# Altium PCB PCB1.PcbDoc (part 2 of 3)
Units mm, origin at the board's own origin, x right, y up, seen from the top; angles counter-clockwise.
Board outline 55.24 x 34.04 mm, 2 copper layers (Top Layer, Bottom Layer), stack 3.048 mm thick; 216 components, 8 nets, 576 pads, 0 vias.
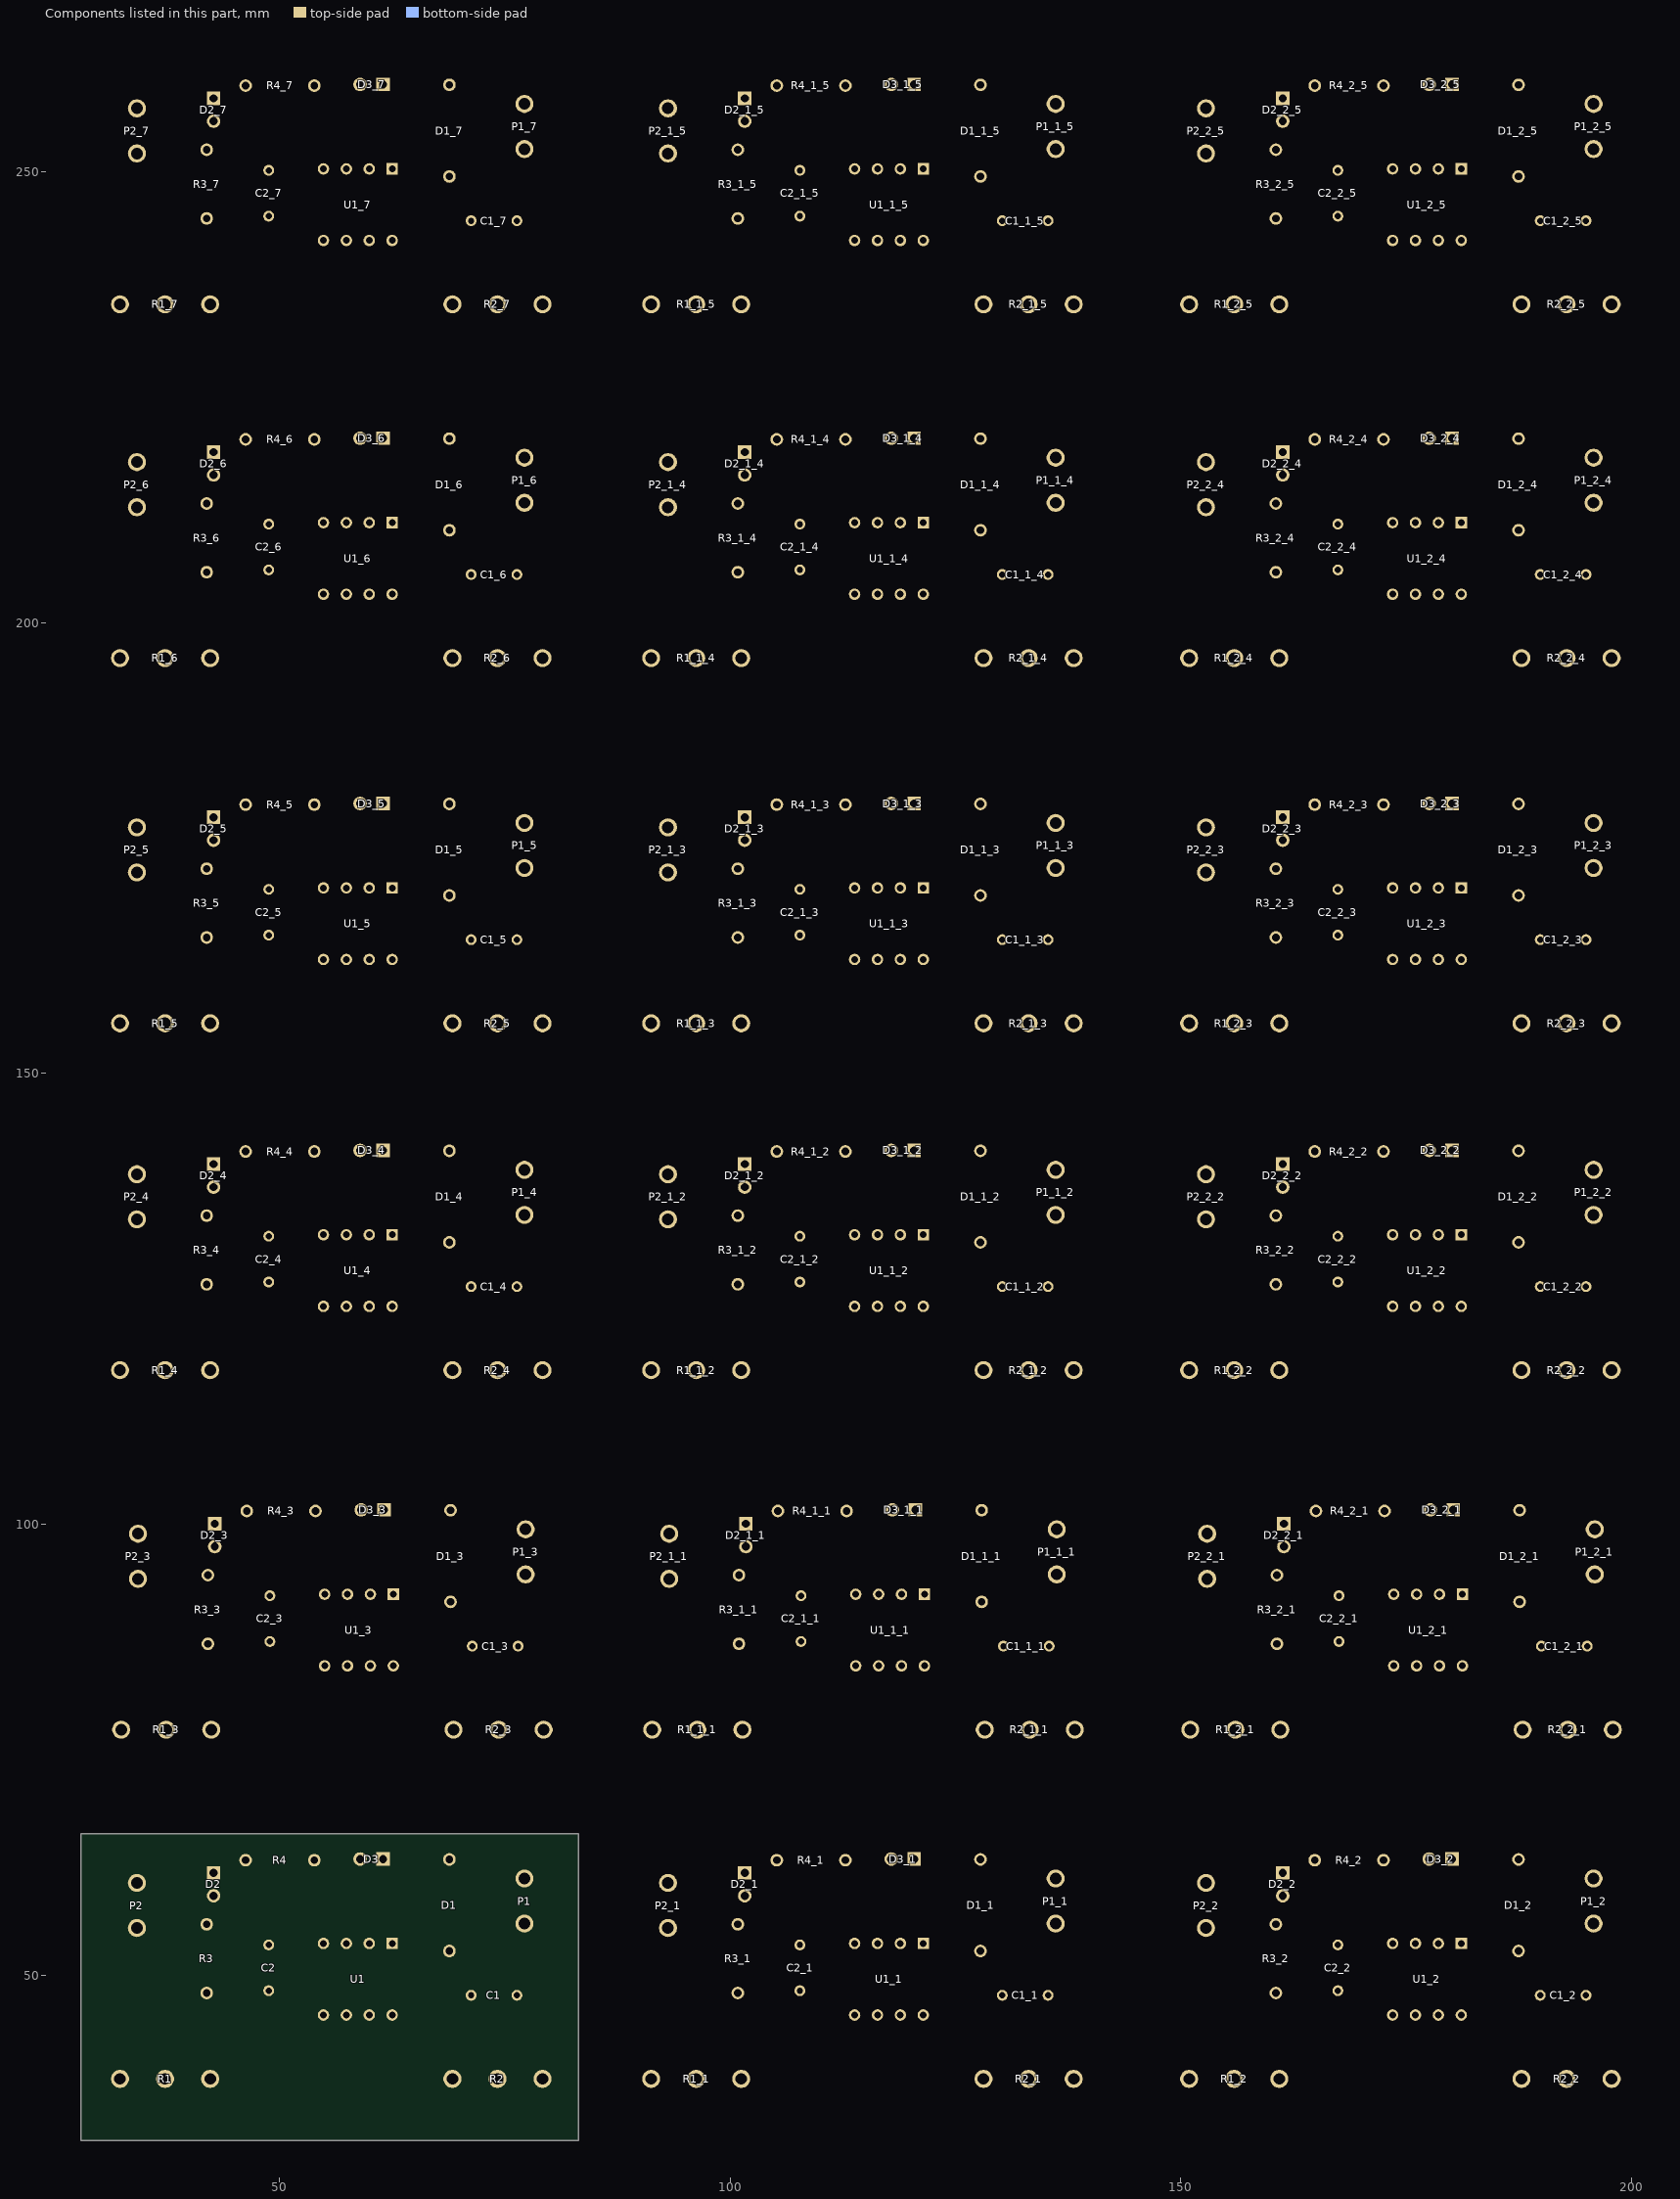
[diagram p2: the components of this part, seen from the top]

## Nets (pads, with @x,y where several pads share a name; then routed paths per layer and width w, separated by ;. In a path a pad name is that pad's centre, name@x,y a point inside that pad or via, vN(x,y) a via of type N, cw(c..) or ccw(c..) an arc to the next point about the centre after c; other vN are vias at no path point) (continued)
copper on no net: | length 5933.9
  Bottom Layer w1.143: 34.163,133.829 40.179,139.845 42.573,139.845 42.672,139.944 42.851,139.766 44.13,139.766 48.794,135.102 48.794,131.953 52.461,135.62 56.053,135.62 57.38,134.293 57.38,132.137 57.404,132.113 ; 34.163,172.31 40.179,178.326 42.573,178.326 42.672,178.425 42.851,178.247 44.13,178.247 48.794,173.583 48.794,170.434 52.461,174.101 56.053,174.101 57.38,172.774 57.38,170.618 57.404,170.594 ; 34.163,212.823 40.179,218.839 42.573,218.839 42.672,218.938 42.851,218.76 44.13,218.76 48.794,214.096 48.794,210.947 52.461,214.614 56.053,214.614 57.38,213.287 57.38,211.131 57.404,211.107 ; 34.163,252.066 40.179,258.082 42.573,258.082 42.672,258.181 42.851,258.003 44.13,258.003 48.794,253.339 48.794,250.19 52.461,253.857 56.053,253.857 57.38,252.53 57.38,250.374 57.404,250.35 ; 34.29,93.951 40.306,99.967 42.7,99.967 42.799,100.066 42.978,99.888 44.257,99.888 48.921,95.224 48.921,92.075 52.588,95.742 56.18,95.742 57.507,94.415 57.507,92.259 57.531,92.235 ; 37.291,117.094 40.745,120.548 56.319,120.548 59.944,124.173 59.944,125.707 60.614,126.376 63.378,126.376 66.548,123.206 66.548,115.824 69.088,113.284 77.075,113.284 79.168,115.377 79.168,117.094 ; 37.291,155.575 40.745,159.029 56.319,159.029 59.944,162.654 59.944,164.188 60.614,164.857 63.378,164.857 66.548,161.687 66.548,154.305 69.088,151.765 77.075,151.765 79.168,153.858 79.168,155.575 ; 37.291,196.088 40.745,199.542 56.319,199.542 59.944,203.167 59.944,204.701 60.614,205.37 63.378,205.37 66.548,202.2 66.548,194.818 69.088,192.278 77.075,192.278 79.168,194.371 79.168,196.088 ; 37.291,235.331 40.745,238.785 56.319,238.785 59.944,242.41 59.944,243.944 60.614,244.613 63.378,244.613 66.548,241.443 66.548,234.061 69.088,231.521 77.075,231.521 79.168,233.614 79.168,235.331 ; 37.418,77.216 40.872,80.67 56.446,80.67 60.071,84.295 60.071,85.829 60.741,86.498 63.505,86.498 66.675,83.328 66.675,75.946 69.215,73.406 77.202,73.406 79.295,75.499 79.295,77.216 ; 41.91,126.619 42.901,126.619 43.155,126.873 ; 41.91,134.239 41.959,134.288 41.959,136.595 42.672,137.308 42.672,137.404 ; 41.91,165.1 42.901,165.1 43.155,165.354 ; 41.91,172.72 41.959,172.769 41.959,175.076 42.672,175.789 42.672,175.885 ; 41.91,205.613 42.901,205.613 43.155,205.867 ; 41.91,213.233 41.959,213.282 41.959,215.589 42.672,216.302 42.672,216.398 ; 41.91,244.856 42.901,244.856 43.155,245.11 ; 41.91,252.476 41.959,252.525 41.959,254.832 42.672,255.545 42.672,255.641 ; 42.037,86.741 43.028,86.741 43.282,86.995 ; 42.037,94.361 42.086,94.41 42.086,96.717 42.799,97.43 42.799,97.526 ; 46.228,141.351 44.635,142.944 32.073,142.944 30.861,141.732 30.861,132.359 33.299,129.921 40.107,129.921 43.155,126.873 ; 46.228,179.832 44.635,181.425 32.073,181.425 30.861,180.213 30.861,170.84 33.299,168.402 40.107,168.402 43.155,165.354 ; 46.228,220.345 44.635,221.938 32.073,221.938 30.861,220.726 30.861,211.353 33.299,208.915 40.107,208.915 43.155,205.867 ; 46.228,259.588 44.635,261.181 32.073,261.181 30.861,259.969 30.861,250.596 33.299,248.158 40.107,248.158 43.155,245.11 ; 46.355,101.473 44.762,103.066 32.2,103.066 30.988,101.854 30.988,92.481 33.426,90.043 40.234,90.043 43.282,86.995 ; 48.794,126.873 43.155,126.873 ; 48.794,165.354 43.155,165.354 ; 48.794,205.867 43.155,205.867 ; 48.794,245.11 43.155,245.11 ; 48.921,86.995 43.282,86.995 ; 53.848,141.351 58.704,141.351 58.831,141.478 58.928,141.478 ; 53.848,179.832 58.704,179.832 58.831,179.959 58.928,179.959 ; 53.848,220.345 58.704,220.345 58.831,220.472 58.928,220.472 ; 53.848,259.588 58.704,259.588 58.831,259.715 58.928,259.715 ; 53.975,101.473 58.831,101.473 58.958,101.6 59.055,101.6 ; 54.864,132.113 52.397,129.646 52.397,124.533 51.054,123.19 39.497,123.19 34.798,118.491 34.798,115.189 35.687,114.3 39.617,114.3 42.291,116.974 42.291,117.094 42.523,117.094 43.793,118.364 58.928,118.364 62.46,121.896 62.46,124.149 62.484,124.173 64.643,122.014 64.643,113.919 66.929,111.633 78.943,111.633 81.661,114.351 81.661,134.168 78.796,137.033 73.235,137.033 68.834,141.434 68.812,141.456 61.49,141.456 61.468,141.478 ; 54.864,170.594 52.397,168.127 52.397,163.014 51.054,161.671 39.497,161.671 34.798,156.972 34.798,153.67 35.687,152.781 39.617,152.781 42.291,155.455 42.291,155.575 42.523,155.575 43.793,156.845 58.928,156.845 62.46,160.377 62.46,162.63 62.484,162.654 64.643,160.495 64.643,152.4 66.929,150.114 78.943,150.114 81.661,152.832 81.661,172.649 78.796,175.514 73.235,175.514 68.834,179.915 68.812,179.937 61.49,179.937 61.468,179.959 ; 54.864,211.107 52.397,208.64 52.397,203.527 51.054,202.184 39.497,202.184 34.798,197.485 34.798,194.183 35.687,193.294 39.617,193.294 42.291,195.968 42.291,196.088 42.523,196.088 43.793,197.358 58.928,197.358 62.46,200.89 62.46,203.143 62.484,203.167 64.643,201.008 64.643,192.913 66.929,190.627 78.943,190.627 81.661,193.345 81.661,213.162 78.796,216.027 73.235,216.027 68.834,220.428 68.812,220.45 61.49,220.45 61.468,220.472 ; 54.864,250.35 52.397,247.883 52.397,242.77 51.054,241.427 39.497,241.427 34.798,236.728 34.798,233.426 35.687,232.537 39.617,232.537 42.291,235.211 42.291,235.331 42.523,235.331 43.793,236.601 58.928,236.601 62.46,240.133 62.46,242.386 62.484,242.41 64.643,240.251 64.643,232.156 66.929,229.87 78.943,229.87 81.661,232.588 81.661,252.405 78.796,255.27 73.235,255.27 68.834,259.671 68.812,259.693 61.49,259.693 61.468,259.715 ; 54.991,92.235 52.524,89.768 52.524,84.655 51.181,83.312 39.624,83.312 34.925,78.613 34.925,75.311 35.814,74.422 39.744,74.422 42.418,77.096 42.418,77.216 42.65,77.216 43.92,78.486 59.055,78.486 62.587,82.018 62.587,84.271 62.611,84.295 64.77,82.136 64.77,74.041 67.056,71.755 79.07,71.755 81.788,74.473 81.788,94.29 78.923,97.155 73.362,97.155 68.961,101.556 68.939,101.578 61.617,101.578 61.595,101.6 ; 57.404,124.173 57.404,126.838 59.944,129.378 ; 57.404,162.654 57.404,165.319 59.944,167.859 ; 57.404,203.167 57.404,205.832 59.944,208.372 ; 57.404,242.41 57.404,245.075 59.944,247.615 ; 57.531,84.295 57.531,86.96 60.071,89.5 ; 59.944,132.113 59.944,129.378 ; 59.944,170.594 59.944,167.859 ; 59.944,211.107 59.944,208.372 ; 59.944,250.35 59.944,247.615 ; 60.071,92.235 60.071,89.5 ; 68.834,131.274 73.536,131.274 77.089,134.827 ; 68.834,169.755 73.536,169.755 77.089,173.308 ; 68.834,210.268 73.536,210.268 77.089,213.821 ; 68.834,249.511 73.536,249.511 77.089,253.064 ; 68.961,91.396 73.663,91.396 77.216,94.949 ; 69.168,117.094 71.068,115.194 74.93,115.194 76.306,116.57 76.306,124.947 76.316,124.957 76.316,126.354 76.327,126.365 ; 69.168,155.575 71.068,153.675 74.93,153.675 76.306,155.051 76.306,163.428 76.316,163.438 76.316,164.835 76.327,164.846 ; 69.168,196.088 71.068,194.188 74.93,194.188 76.306,195.564 76.306,203.941 76.316,203.951 76.316,205.348 76.327,205.359 ; 69.168,235.331 71.068,233.431 74.93,233.431 76.306,234.807 76.306,243.184 76.316,243.194 76.316,244.591 76.327,244.602 ; 69.295,77.216 71.195,75.316 75.057,75.316 76.433,76.692 76.433,85.069 76.443,85.079 76.443,86.476 76.454,86.487 ; 74.168,117.094 74.004,117.258 74.004,119.577 71.247,122.334 71.247,126.365 65.786,126.365 63.373,128.778 60.544,128.778 59.944,129.378 ; 74.168,155.575 74.004,155.739 74.004,158.058 71.247,160.815 71.247,164.846 65.786,164.846 63.373,167.259 60.544,167.259 59.944,167.859 ; 74.168,196.088 74.004,196.252 74.004,198.571 71.247,201.328 71.247,205.359 65.786,205.359 63.373,207.772 60.544,207.772 59.944,208.372 ; 74.168,235.331 74.004,235.495 74.004,237.814 71.247,240.571 71.247,244.602 65.786,244.602 63.373,247.015 60.544,247.015 59.944,247.615 ; 74.295,77.216 74.131,77.38 74.131,79.699 71.374,82.456 71.374,86.487 65.913,86.487 63.5,88.9 60.671,88.9 60.071,89.5 ; 93.091,55.216 99.107,61.232 101.501,61.232 101.6,61.331 101.779,61.153 103.058,61.153 107.722,56.489 107.722,53.34 111.389,57.007 114.981,57.007 116.308,55.68 116.308,53.524 116.332,53.5 ; 93.091,133.829 99.107,139.845 101.501,139.845 101.6,139.944 101.779,139.766 103.058,139.766 107.722,135.102 107.722,131.953 111.389,135.62 114.981,135.62 116.308,134.293 116.308,132.137 116.332,132.113 ; 93.091,172.31 99.107,178.326 101.501,178.326 101.6,178.425 101.779,178.247 103.058,178.247 107.722,173.583 107.722,170.434 111.389,174.101 114.981,174.101 116.308,172.774 116.308,170.618 116.332,170.594 ; 93.091,212.823 99.107,218.839 101.501,218.839 101.6,218.938 101.779,218.76 103.058,218.76 107.722,214.096 107.722,210.947 111.389,214.614 114.981,214.614 116.308,213.287 116.308,211.131 116.332,211.107 ; 93.091,252.066 99.107,258.082 101.501,258.082 101.6,258.181 101.779,258.003 103.058,258.003 107.722,253.339 107.722,250.19 111.389,253.857 114.981,253.857 116.308,252.53 116.308,250.374 116.332,250.35 ; 93.218,93.951 99.234,99.967 101.628,99.967 101.727,100.066 101.906,99.888 103.185,99.888 107.849,95.224 107.849,92.075 111.516,95.742 115.108,95.742 116.435,94.415 116.435,92.259 116.459,92.235 ; 96.219,38.481 99.673,41.935 115.247,41.935 118.872,45.56 118.872,47.094 119.542,47.763 122.306,47.763 125.476,44.593 125.476,37.211 128.016,34.671 136.003,34.671 138.096,36.764 138.096,38.481 ; 96.219,117.094 99.673,120.548 115.247,120.548 118.872,124.173 118.872,125.707 119.542,126.376 122.306,126.376 125.476,123.206 125.476,115.824 128.016,113.284 136.003,113.284 138.096,115.377 138.096,117.094 ; 96.219,155.575 99.673,159.029 115.247,159.029 118.872,162.654 118.872,164.188 119.542,164.857 122.306,164.857 125.476,161.687 125.476,154.305 128.016,151.765 136.003,151.765 138.096,153.858 138.096,155.575 ; 96.219,196.088 99.673,199.542 115.247,199.542 118.872,203.167 118.872,204.701 119.542,205.37 122.306,205.37 125.476,202.2 125.476,194.818 128.016,192.278 136.003,192.278 138.096,194.371 138.096,196.088 ; 96.219,235.331 99.673,238.785 115.247,238.785 118.872,242.41 118.872,243.944 119.542,244.613 122.306,244.613 125.476,241.443 125.476,234.061 128.016,231.521 136.003,231.521 138.096,233.614 138.096,235.331 ; 96.346,77.216 99.8,80.67 115.374,80.67 118.999,84.295 118.999,85.829 119.669,86.498 122.433,86.498 125.603,83.328 125.603,75.946 128.143,73.406 136.13,73.406 138.223,75.499 138.223,77.216 ; 100.838,48.006 101.829,48.006 102.083,48.26 ; 100.838,55.626 100.887,55.675 100.887,57.982 101.6,58.695 101.6,58.791 ; 100.838,126.619 101.829,126.619 102.083,126.873 ; 100.838,134.239 100.887,134.288 100.887,136.595 101.6,137.308 101.6,137.404 ; 100.838,165.1 101.829,165.1 102.083,165.354 ; 100.838,172.72 100.887,172.769 100.887,175.076 101.6,175.789 101.6,175.885 ; 100.838,205.613 101.829,205.613 102.083,205.867 ; 100.838,213.233 100.887,213.282 100.887,215.589 101.6,216.302 101.6,216.398 ; 100.838,244.856 101.829,244.856 102.083,245.11 ; 100.838,252.476 100.887,252.525 100.887,254.832 101.6,255.545 101.6,255.641 ; 100.965,86.741 101.956,86.741 102.21,86.995 ; 100.965,94.361 101.014,94.41 101.014,96.717 101.727,97.43 101.727,97.526 ; 105.156,62.738 103.563,64.331 91.001,64.331 89.789,63.119 89.789,53.746 92.227,51.308 99.035,51.308 102.083,48.26 ; 105.156,141.351 103.563,142.944 91.001,142.944 89.789,141.732 89.789,132.359 92.227,129.921 99.035,129.921 102.083,126.873 ; 105.156,179.832 103.563,181.425 91.001,181.425 89.789,180.213 89.789,170.84 92.227,168.402 99.035,168.402 102.083,165.354 ; 105.156,220.345 103.563,221.938 91.001,221.938 89.789,220.726 89.789,211.353 92.227,208.915 99.035,208.915 102.083,205.867 ; 105.156,259.588 103.563,261.181 91.001,261.181 89.789,259.969 89.789,250.596 92.227,248.158 99.035,248.158 102.083,245.11 ; 105.283,101.473 103.69,103.066 91.128,103.066 89.916,101.854 89.916,92.481 92.354,90.043 99.162,90.043 102.21,86.995 ; 107.722,48.26 102.083,48.26 ; 107.722,126.873 102.083,126.873 ; 107.722,165.354 102.083,165.354 ; 107.722,205.867 102.083,205.867 ; 107.722,245.11 102.083,245.11 ; 107.849,86.995 102.21,86.995 ; 112.776,62.738 117.632,62.738 117.759,62.865 117.856,62.865 ; 112.776,141.351 117.632,141.351 117.759,141.478 117.856,141.478 ; 112.776,179.832 117.632,179.832 117.759,179.959 117.856,179.959 ; 112.776,220.345 117.632,220.345 117.759,220.472 117.856,220.472 ; 112.776,259.588 117.632,259.588 117.759,259.715 117.856,259.715 ; 112.903,101.473 117.759,101.473 117.886,101.6 117.983,101.6 ; 113.792,53.5 111.325,51.033 111.325,45.92 109.982,44.577 98.425,44.577 93.726,39.878 93.726,36.576 94.615,35.687 98.545,35.687 101.219,38.361 101.219,38.481 101.451,38.481 102.721,39.751 117.856,39.751 121.388,43.283 121.388,45.536 121.412,45.56 123.571,43.401 123.571,35.306 125.857,33.02 137.871,33.02 140.589,35.738 140.589,55.555 137.724,58.42 132.163,58.42 127.762,62.821 127.74,62.843 120.418,62.843 120.396,62.865 ; 113.792,132.113 111.325,129.646 111.325,124.533 109.982,123.19 98.425,123.19 93.726,118.491 93.726,115.189 94.615,114.3 98.545,114.3 101.219,116.974 101.219,117.094 101.451,117.094 102.721,118.364 117.856,118.364 121.388,121.896 121.388,124.149 121.412,124.173 123.571,122.014 123.571,113.919 125.857,111.633 137.871,111.633 140.589,114.351 140.589,134.168 137.724,137.033 132.163,137.033 127.762,141.434 127.74,141.456 120.418,141.456 120.396,141.478 ; 113.792,170.594 111.325,168.127 111.325,163.014 109.982,161.671 98.425,161.671 93.726,156.972 93.726,153.67 94.615,152.781 98.545,152.781 101.219,155.455 101.219,155.575 101.451,155.575 102.721,156.845 117.856,156.845 121.388,160.377 121.388,162.63 121.412,162.654 123.571,160.495 123.571,152.4 125.857,150.114 137.871,150.114 140.589,152.832 140.589,172.649 137.724,175.514 132.163,175.514 127.762,179.915 127.74,179.937 120.418,179.937 120.396,179.959 ; 113.792,211.107 111.325,208.64 111.325,203.527 109.982,202.184 98.425,202.184 93.726,197.485 93.726,194.183 94.615,193.294 98.545,193.294 101.219,195.968 101.219,196.088 101.451,196.088 102.721,197.358 117.856,197.358 121.388,200.89 121.388,203.143 121.412,203.167 123.571,201.008 123.571,192.913 125.857,190.627 137.871,190.627 140.589,193.345 140.589,213.162 137.724,216.027 132.163,216.027 127.762,220.428 127.74,220.45 120.418,220.45 120.396,220.472 ; 113.792,250.35 111.325,247.883 111.325,242.77 109.982,241.427 98.425,241.427 93.726,236.728 93.726,233.426 94.615,232.537 98.545,232.537 101.219,235.211 101.219,235.331 101.451,235.331 102.721,236.601 117.856,236.601 121.388,240.133 121.388,242.386 121.412,242.41 123.571,240.251 123.571,232.156 125.857,229.87 137.871,229.87 140.589,232.588 140.589,252.405 137.724,255.27 132.163,255.27 127.762,259.671 127.74,259.693 120.418,259.693 120.396,259.715 ; 113.919,92.235 111.452,89.768 111.452,84.655 110.109,83.312 98.552,83.312 93.853,78.613 93.853,75.311 94.742,74.422 98.672,74.422 101.346,77.096 101.346,77.216 101.578,77.216 102.848,78.486 117.983,78.486 121.515,82.018 121.515,84.271 121.539,84.295 123.698,82.136 123.698,74.041 125.984,71.755 137.998,71.755 140.716,74.473 140.716,94.29 137.851,97.155 132.29,97.155 127.889,101.556 127.867,101.578 120.545,101.578 120.523,101.6 ; 116.332,45.56 116.332,48.225 118.872,50.765 ; 116.332,124.173 116.332,126.838 118.872,129.378 ; 116.332,162.654 116.332,165.319 118.872,167.859 ; 116.332,203.167 116.332,205.832 118.872,208.372 ; 116.332,242.41 116.332,245.075 118.872,247.615 ; 116.459,84.295 116.459,86.96 118.999,89.5 ; 118.872,53.5 118.872,50.765 ; 118.872,132.113 118.872,129.378 ; 118.872,170.594 118.872,167.859 ; 118.872,211.107 118.872,208.372 ; 118.872,250.35 118.872,247.615 ; 118.999,92.235 118.999,89.5 ; 127.762,52.661 132.464,52.661 136.017,56.214 ; 127.762,131.274 132.464,131.274 136.017,134.827 ; 127.762,169.755 132.464,169.755 136.017,173.308 ; 127.762,210.268 132.464,210.268 136.017,213.821 ; 127.762,249.511 132.464,249.511 136.017,253.064 ; 127.889,91.396 132.591,91.396 136.144,94.949 ; 128.096,38.481 129.996,36.581 133.858,36.581 135.234,37.957 135.234,46.334 135.244,46.344 135.244,47.741 135.255,47.752 ; 128.096,117.094 129.996,115.194 133.858,115.194 135.234,116.57 135.234,124.947 135.244,124.957 135.244,126.354 135.255,126.365 ; 128.096,155.575 129.996,153.675 133.858,153.675 135.234,155.051 135.234,163.428 135.244,163.438 135.244,164.835 135.255,164.846 ; 128.096,196.088 129.996,194.188 133.858,194.188 135.234,195.564 135.234,203.941 135.244,203.951 135.244,205.348 135.255,205.359 ; 128.096,235.331 129.996,233.431 133.858,233.431 135.234,234.807 135.234,243.184 135.244,243.194 135.244,244.591 135.255,244.602 ; 128.223,77.216 130.123,75.316 133.985,75.316 135.361,76.692 135.361,85.069 135.371,85.079 135.371,86.476 135.382,86.487 ; 133.096,38.481 132.932,38.645 132.932,40.964 130.175,43.721 130.175,47.752 124.714,47.752 122.301,50.165 119.472,50.165 118.872,50.765 ; 133.096,117.094 132.932,117.258 132.932,119.577 130.175,122.334 130.175,126.365 124.714,126.365 122.301,128.778 119.472,128.778 118.872,129.378 ; 133.096,155.575 132.932,155.739 132.932,158.058 130.175,160.815 130.175,164.846 124.714,164.846 122.301,167.259 119.472,167.259 118.872,167.859 ; 133.096,196.088 132.932,196.252 132.932,198.571 130.175,201.328 130.175,205.359 124.714,205.359 122.301,207.772 119.472,207.772 118.872,208.372 ; 133.096,235.331 132.932,235.495 132.932,237.814 130.175,240.571 130.175,244.602 124.714,244.602 122.301,247.015 119.472,247.015 118.872,247.615 ; 133.223,77.216 133.059,77.38 133.059,79.699 130.302,82.456 130.302,86.487 124.841,86.487 122.428,88.9 119.599,88.9 118.999,89.5 ; 152.781,55.216 158.797,61.232 161.191,61.232 161.29,61.331 161.469,61.153 162.748,61.153 167.412,56.489 167.412,53.34 171.079,57.007 174.671,57.007 175.998,55.68 175.998,53.524 176.022,53.5 ; 152.781,133.829 158.797,139.845 161.191,139.845 161.29,139.944 161.469,139.766 162.748,139.766 167.412,135.102 167.412,131.953 171.079,135.62 174.671,135.62 175.998,134.293 175.998,132.137 176.022,132.113 ; 152.781,172.31 158.797,178.326 161.191,178.326 161.29,178.425 161.469,178.247 162.748,178.247 167.412,173.583 167.412,170.434 171.079,174.101 174.671,174.101 175.998,172.774 175.998,170.618 176.022,170.594 ; 152.781,212.823 158.797,218.839 161.191,218.839 161.29,218.938 161.469,218.76 162.748,218.76 167.412,214.096 167.412,210.947 171.079,214.614 174.671,214.614 175.998,213.287 175.998,211.131 176.022,211.107 ; 152.781,252.066 158.797,258.082 161.191,258.082 161.29,258.181 161.469,258.003 162.748,258.003 167.412,253.339 167.412,250.19 171.079,253.857 174.671,253.857 175.998,252.53 175.998,250.374 176.022,250.35 ; 152.908,93.951 158.924,99.967 161.318,99.967 161.417,100.066 161.596,99.888 162.875,99.888 167.539,95.224 167.539,92.075 171.206,95.742 174.798,95.742 176.125,94.415 176.125,92.259 176.149,92.235 ; 155.909,38.481 159.363,41.935 174.937,41.935 178.562,45.56 178.562,47.094 179.232,47.763 181.996,47.763 185.166,44.593 185.166,37.211 187.706,34.671 195.693,34.671 197.786,36.764 197.786,38.481 ; 155.909,117.094 159.363,120.548 174.937,120.548 178.562,124.173 178.562,125.707 179.232,126.376 181.996,126.376 185.166,123.206 185.166,115.824 187.706,113.284 195.693,113.284 197.786,115.377 197.786,117.094 ; 155.909,155.575 159.363,159.029 174.937,159.029 178.562,162.654 178.562,164.188 179.232,164.857 181.996,164.857 185.166,161.687 185.166,154.305 187.706,151.765 195.693,151.765 197.786,153.858 197.786,155.575 ; 155.909,196.088 159.363,199.542 174.937,199.542 178.562,203.167 178.562,204.701 179.232,205.37 181.996,205.37 185.166,202.2 185.166,194.818 187.706,192.278 195.693,192.278 197.786,194.371 197.786,196.088 ; 155.909,235.331 159.363,238.785 174.937,238.785 178.562,242.41 178.562,243.944 179.232,244.613 181.996,244.613 185.166,241.443 185.166,234.061 187.706,231.521 195.693,231.521 197.786,233.614 197.786,235.331 ; 156.036,77.216 159.49,80.67 175.064,80.67 178.689,84.295 178.689,85.829 179.359,86.498 182.123,86.498 185.293,83.328 185.293,75.946 187.833,73.406 195.82,73.406 197.913,75.499 197.913,77.216 ; 160.528,48.006 161.519,48.006 161.773,48.26 ; 160.528,55.626 160.577,55.675 160.577,57.982 161.29,58.695 161.29,58.791 ; 160.528,126.619 161.519,126.619 161.773,126.873 ; 160.528,134.239 160.577,134.288 160.577,136.595 161.29,137.308 161.29,137.404 ; 160.528,165.1 161.519,165.1 161.773,165.354 ; 160.528,172.72 160.577,172.769 160.577,175.076 161.29,175.789 161.29,175.885 ; 160.528,205.613 161.519,205.613 161.773,205.867 ; 160.528,213.233 160.577,213.282 160.577,215.589 161.29,216.302 161.29,216.398 ; 160.528,244.856 161.519,244.856 161.773,245.11 ; 160.528,252.476 160.577,252.525 160.577,254.832 161.29,255.545 161.29,255.641 ; 160.655,86.741 161.646,86.741 161.9,86.995 ; 160.655,94.361 160.704,94.41 160.704,96.717 161.417,97.43 161.417,97.526 ; 164.846,62.738 163.253,64.331 150.691,64.331 149.479,63.119 149.479,53.746 151.917,51.308 158.725,51.308 161.773,48.26 ; 164.846,141.351 163.253,142.944 150.691,142.944 149.479,141.732 149.479,132.359 151.917,129.921 158.725,129.921 161.773,126.873 ; 164.846,179.832 163.253,181.425 150.691,181.425 149.479,180.213 149.479,170.84 151.917,168.402 158.725,168.402 161.773,165.354 ; 164.846,220.345 163.253,221.938 150.691,221.938 149.479,220.726 149.479,211.353 151.917,208.915 158.725,208.915 161.773,205.867 ; 164.846,259.588 163.253,261.181 150.691,261.181 149.479,259.969 149.479,250.596 151.917,248.158 158.725,248.158 161.773,245.11 ; 164.973,101.473 163.38,103.066 150.818,103.066 149.606,101.854 149.606,92.481 152.044,90.043 158.852,90.043 161.9,86.995 ; 167.412,48.26 161.773,48.26 ; 167.412,126.873 161.773,126.873 ; 167.412,165.354 161.773,165.354 ; 167.412,205.867 161.773,205.867 ; 167.412,245.11 161.773,245.11 ; 167.539,86.995 161.9,86.995 ; 172.466,62.738 177.322,62.738 177.449,62.865 177.546,62.865 ; 172.466,141.351 177.322,141.351 177.449,141.478 177.546,141.478 ; 172.466,179.832 177.322,179.832 177.449,179.959 177.546,179.959 ; 172.466,220.345 177.322,220.345 177.449,220.472 177.546,220.472 ; 172.466,259.588 177.322,259.588 177.449,259.715 177.546,259.715 ; 172.593,101.473 177.449,101.473 177.576,101.6 177.673,101.6 ; 173.482,53.5 171.015,51.033 171.015,45.92 169.672,44.577 158.115,44.577 153.416,39.878 153.416,36.576 154.305,35.687 158.235,35.687 160.909,38.361 160.909,38.481 161.141,38.481 162.411,39.751 177.546,39.751 181.078,43.283 181.078,45.536 181.102,45.56 183.261,43.401 183.261,35.306 185.547,33.02 197.561,33.02 200.279,35.738 200.279,55.555 197.414,58.42 191.853,58.42 187.452,62.821 187.43,62.843 180.108,62.843 180.086,62.865 ; 173.482,132.113 171.015,129.646 171.015,124.533 169.672,123.19 158.115,123.19 153.416,118.491 153.416,115.189 154.305,114.3 158.235,114.3 160.909,116.974 160.909,117.094 161.141,117.094 162.411,118.364 177.546,118.364 181.078,121.896 181.078,124.149 181.102,124.173 183.261,122.014 183.261,113.919 185.547,111.633 197.561,111.633 200.279,114.351 200.279,134.168 197.414,137.033 191.853,137.033 187.452,141.434 187.43,141.456 180.108,141.456 180.086,141.478 ; 173.482,170.594 171.015,168.127 171.015,163.014 169.672,161.671 158.115,161.671 153.416,156.972 153.416,153.67 154.305,152.781 158.235,152.781 160.909,155.455 160.909,155.575 161.141,155.575 162.411,156.845 177.546,156.845 181.078,160.377 181.078,162.63 181.102,162.654 183.261,160.495 183.261,152.4 185.547,150.114 197.561,150.114 200.279,152.832 200.279,172.649 197.414,175.514 191.853,175.514 187.452,179.915 187.43,179.937 180.108,179.937 180.086,179.959 ; 173.482,211.107 171.015,208.64 171.015,203.527 169.672,202.184 158.115,202.184 153.416,197.485 153.416,194.183 154.305,193.294 158.235,193.294 160.909,195.968 160.909,196.088 161.141,196.088 162.411,197.358 177.546,197.358 181.078,200.89 181.078,203.143 181.102,203.167 183.261,201.008 183.261,192.913 185.547,190.627 197.561,190.627 200.279,193.345 200.279,213.162 197.414,216.027 191.853,216.027 187.452,220.428 187.43,220.45 180.108,220.45 180.086,220.472 ; 173.482,250.35 171.015,247.883 171.015,242.77 169.672,241.427 158.115,241.427 153.416,236.728 153.416,233.426 154.305,232.537 158.235,232.537 160.909,235.211 160.909,235.331 161.141,235.331 162.411,236.601 177.546,236.601 181.078,240.133 181.078,242.386 181.102,242.41 183.261,240.251 183.261,232.156 185.547,229.87 197.561,229.87 200.279,232.588 200.279,252.405 197.414,255.27 191.853,255.27 187.452,259.671 187.43,259.693 180.108,259.693 180.086,259.715 ; 173.609,92.235 171.142,89.768 171.142,84.655 169.799,83.312 158.242,83.312 153.543,78.613 153.543,75.311 154.432,74.422 158.362,74.422 161.036,77.096 161.036,77.216 161.268,77.216 162.538,78.486 177.673,78.486 181.205,82.018 181.205,84.271 181.229,84.295 183.388,82.136 183.388,74.041 185.674,71.755 197.688,71.755 200.406,74.473 200.406,94.29 197.541,97.155 191.98,97.155 187.579,101.556 187.557,101.578 180.235,101.578 180.213,101.6 ; 176.022,45.56 176.022,48.225 178.562,50.765 ; 176.022,124.173 176.022,126.838 178.562,129.378 ; 176.022,162.654 176.022,165.319 178.562,167.859 ; 176.022,203.167 176.022,205.832 178.562,208.372 ; 176.022,242.41 176.022,245.075 178.562,247.615 ; 176.149,84.295 176.149,86.96 178.689,89.5 ; 178.562,53.5 178.562,50.765 ; 178.562,132.113 178.562,129.378 ; 178.562,170.594 178.562,167.859 ; 178.562,211.107 178.562,208.372 ; 178.562,250.35 178.562,247.615 ; 178.689,92.235 178.689,89.5 ; 187.452,52.661 192.154,52.661 195.707,56.214 ; 187.452,131.274 192.154,131.274 195.707,134.827 ; 187.452,169.755 192.154,169.755 195.707,173.308 ; 187.452,210.268 192.154,210.268 195.707,213.821 ; 187.452,249.511 192.154,249.511 195.707,253.064 ; 187.579,91.396 192.281,91.396 195.834,94.949 ; 187.786,38.481 189.686,36.581 193.548,36.581 194.924,37.957 194.924,46.334 194.934,46.344 194.934,47.741 194.945,47.752 ; 187.786,117.094 189.686,115.194 193.548,115.194 194.924,116.57 194.924,124.947 194.934,124.957 194.934,126.354 194.945,126.365 ; 187.786,155.575 189.686,153.675 193.548,153.675 194.924,155.051 194.924,163.428 194.934,163.438 194.934,164.835 194.945,164.846 ; 187.786,196.088 189.686,194.188 193.548,194.188 194.924,195.564 194.924,203.941 194.934,203.951 194.934,205.348 194.945,205.359 ; 187.786,235.331 189.686,233.431 193.548,233.431 194.924,234.807 194.924,243.184 194.934,243.194 194.934,244.591 194.945,244.602 ; 187.913,77.216 189.813,75.316 193.675,75.316 195.051,76.692 195.051,85.069 195.061,85.079 195.061,86.476 195.072,86.487 ; 192.786,38.481 192.622,38.645 192.622,40.964 189.865,43.721 189.865,47.752 184.404,47.752 181.991,50.165 179.162,50.165 178.562,50.765 ; 192.786,117.094 192.622,117.258 192.622,119.577 189.865,122.334 189.865,126.365 184.404,126.365 181.991,128.778 179.162,128.778 178.562,129.378 ; 192.786,155.575 192.622,155.739 192.622,158.058 189.865,160.815 189.865,164.846 184.404,164.846 181.991,167.259 179.162,167.259 178.562,167.859 ; 192.786,196.088 192.622,196.252 192.622,198.571 189.865,201.328 189.865,205.359 184.404,205.359 181.991,207.772 179.162,207.772 178.562,208.372 ; 192.786,235.331 192.622,235.495 192.622,237.814 189.865,240.571 189.865,244.602 184.404,244.602 181.991,247.015 179.162,247.015 178.562,247.615 ; 192.913,77.216 192.749,77.38 192.749,79.699 189.992,82.456 189.992,86.487 184.531,86.487 182.118,88.9 179.289,88.9 178.689,89.5

## Polygon pours and split planes (outlines as drawn)
no net on Bottom Layer "NONET_L02_P1140" (solid, remove dead copper, pour order 1140): 47.244,254.635 48.794,253.085 48.794,250.19 48.83,250.19 53.332,254.381
no net on Bottom Layer "NONET_L02_P1138" (solid, remove dead copper, pour order 1138): 58.249,245.745 64.643,245.745 63.119,247.269 61.722,247.269 61.722,247.396 60.071,249.047
no net on Bottom Layer "NONET_L02_P1136" (solid, remove dead copper, pour order 1136): 64.643,235.966 62.865,237.744 60.273,237.744 60.146,237.871 62.94,240.971 63.119,241.463 63.431,241.463 64.643,240.251
no net on Bottom Layer "NONET_L02_P1134" (solid, remove dead copper, pour order 1134): 67.818,244.602 71.247,241.173 71.247,244.856
no net on Bottom Layer "NONET_L02_P1132" (solid, remove dead copper, pour order 1132): 28.575,235.839 41.656,235.839 41.656,239.014 45.212,242.57 51.308,242.57 52.578,243.84 52.397,244.021 52.397,248.772 64.42,248.772 71.788,241.403 71.788,240.919 81.534,240.919 81.915,241.3 81.915,262.509 28.956,262.509 28.829,262.509
no net on Bottom Layer "NONET_L02_P1130" (solid, remove dead copper, pour order 1130): 87.503,235.839 100.584,235.839 100.584,239.014 104.14,242.57 110.236,242.57 111.506,243.84 111.325,244.021 111.325,248.772 123.348,248.772 130.716,241.403 130.716,240.919 140.462,240.919 140.843,241.3 140.843,262.509 87.884,262.509 87.757,262.509
no net on Bottom Layer "NONET_L02_P1128" (solid, remove dead copper, pour order 1128): 126.746,244.602 130.175,241.173 130.175,244.856
no net on Bottom Layer "NONET_L02_P1126" (solid, remove dead copper, pour order 1126): 123.571,235.966 121.793,237.744 119.201,237.744 119.074,237.871 121.868,240.971 122.047,241.463 122.359,241.463 123.571,240.251
no net on Bottom Layer "NONET_L02_P1124" (solid, remove dead copper, pour order 1124): 117.177,245.745 123.571,245.745 122.047,247.269 120.65,247.269 120.65,247.396 118.999,249.047
no net on Bottom Layer "NONET_L02_P1122" (solid, remove dead copper, pour order 1122): 106.172,254.635 107.722,253.085 107.722,250.19 107.758,250.19 112.26,254.381
no net on Bottom Layer "NONET_L02_P1120" (solid, remove dead copper, pour order 1120): 147.193,235.839 160.274,235.839 160.274,239.014 163.83,242.57 169.926,242.57 171.196,243.84 171.015,244.021 171.015,248.772 183.038,248.772 190.406,241.403 190.406,240.919 200.152,240.919 200.533,241.3 200.533,262.509 147.574,262.509 147.447,262.509
no net on Bottom Layer "NONET_L02_P1118" (solid, remove dead copper, pour order 1118): 186.436,244.602 189.865,241.173 189.865,244.856
no net on Bottom Layer "NONET_L02_P1116" (solid, remove dead copper, pour order 1116): 183.261,235.966 181.483,237.744 178.891,237.744 178.764,237.871 181.558,240.971 181.737,241.463 182.049,241.463 183.261,240.251
no net on Bottom Layer "NONET_L02_P1114" (solid, remove dead copper, pour order 1114): 176.867,245.745 183.261,245.745 181.737,247.269 180.34,247.269 180.34,247.396 178.689,249.047
no net on Bottom Layer "NONET_L02_P1112" (solid, remove dead copper, pour order 1112): 165.862,254.635 167.412,253.085 167.412,250.19 167.448,250.19 171.95,254.381
no net on Bottom Layer "NONET_L02_P1110" (solid, remove dead copper, pour order 1110): 47.244,215.392 48.794,213.842 48.794,210.947 48.83,210.947 53.332,215.138
no net on Bottom Layer "NONET_L02_P1108" (solid, remove dead copper, pour order 1108): 58.249,206.502 64.643,206.502 63.119,208.026 61.722,208.026 61.722,208.153 60.071,209.804
no net on Bottom Layer "NONET_L02_P1106" (solid, remove dead copper, pour order 1106): 64.643,196.723 62.865,198.501 60.273,198.501 60.146,198.628 62.94,201.728 63.119,202.22 63.431,202.22 64.643,201.008
no net on Bottom Layer "NONET_L02_P1104" (solid, remove dead copper, pour order 1104): 67.818,205.359 71.247,201.93 71.247,205.613
no net on Bottom Layer "NONET_L02_P1102" (solid, remove dead copper, pour order 1102): 28.575,196.596 41.656,196.596 41.656,199.771 45.212,203.327 51.308,203.327 52.578,204.597 52.397,204.778 52.397,209.529 64.42,209.529 71.788,202.16 71.788,201.676 81.534,201.676 81.915,202.057 81.915,223.266 28.956,223.266 28.829,223.266
no net on Bottom Layer "NONET_L02_P1100" (solid, remove dead copper, pour order 1100): 87.503,196.596 100.584,196.596 100.584,199.771 104.14,203.327 110.236,203.327 111.506,204.597 111.325,204.778 111.325,209.529 123.348,209.529 130.716,202.16 130.716,201.676 140.462,201.676 140.843,202.057 140.843,223.266 87.884,223.266 87.757,223.266
no net on Bottom Layer "NONET_L02_P1098" (solid, remove dead copper, pour order 1098): 126.746,205.359 130.175,201.93 130.175,205.613
no net on Bottom Layer "NONET_L02_P1096" (solid, remove dead copper, pour order 1096): 123.571,196.723 121.793,198.501 119.201,198.501 119.074,198.628 121.868,201.728 122.047,202.22 122.359,202.22 123.571,201.008
no net on Bottom Layer "NONET_L02_P1094" (solid, remove dead copper, pour order 1094): 117.177,206.502 123.571,206.502 122.047,208.026 120.65,208.026 120.65,208.153 118.999,209.804
no net on Bottom Layer "NONET_L02_P1092" (solid, remove dead copper, pour order 1092): 106.172,215.392 107.722,213.842 107.722,210.947 107.758,210.947 112.26,215.138
no net on Bottom Layer "NONET_L02_P1090" (solid, remove dead copper, pour order 1090): 147.193,196.596 160.274,196.596 160.274,199.771 163.83,203.327 169.926,203.327 171.196,204.597 171.015,204.778 171.015,209.529 183.038,209.529 190.406,202.16 190.406,201.676 200.152,201.676 200.533,202.057 200.533,223.266 147.574,223.266 147.447,223.266
no net on Bottom Layer "NONET_L02_P1088" (solid, remove dead copper, pour order 1088): 186.436,205.359 189.865,201.93 189.865,205.613
no net on Bottom Layer "NONET_L02_P1086" (solid, remove dead copper, pour order 1086): 183.261,196.723 181.483,198.501 178.891,198.501 178.764,198.628 181.558,201.728 181.737,202.22 182.049,202.22 183.261,201.008
no net on Bottom Layer "NONET_L02_P1084" (solid, remove dead copper, pour order 1084): 176.867,206.502 183.261,206.502 181.737,208.026 180.34,208.026 180.34,208.153 178.689,209.804
no net on Bottom Layer "NONET_L02_P1082" (solid, remove dead copper, pour order 1082): 165.862,215.392 167.412,213.842 167.412,210.947 167.448,210.947 171.95,215.138
no net on Bottom Layer "NONET_L02_P1080" (solid, remove dead copper, pour order 1080): 47.244,174.879 48.794,173.329 48.794,170.434 48.83,170.434 53.332,174.625
no net on Bottom Layer "NONET_L02_P1078" (solid, remove dead copper, pour order 1078): 58.249,165.989 64.643,165.989 63.119,167.513 61.722,167.513 61.722,167.64 60.071,169.291
no net on Bottom Layer "NONET_L02_P1076" (solid, remove dead copper, pour order 1076): 64.643,156.21 62.865,157.988 60.273,157.988 60.146,158.115 62.94,161.215 63.119,161.707 63.431,161.707 64.643,160.495
no net on Bottom Layer "NONET_L02_P1074" (solid, remove dead copper, pour order 1074): 67.818,164.846 71.247,161.417 71.247,165.1
no net on Bottom Layer "NONET_L02_P1072" (solid, remove dead copper, pour order 1072): 28.575,156.083 41.656,156.083 41.656,159.258 45.212,162.814 51.308,162.814 52.578,164.084 52.397,164.265 52.397,169.016 64.42,169.016 71.788,161.647 71.788,161.163 81.534,161.163 81.915,161.544 81.915,182.753 28.956,182.753 28.829,182.753
no net on Bottom Layer "NONET_L02_P1070" (solid, remove dead copper, pour order 1070): 87.503,156.083 100.584,156.083 100.584,159.258 104.14,162.814 110.236,162.814 111.506,164.084 111.325,164.265 111.325,169.016 123.348,169.016 130.716,161.647 130.716,161.163 140.462,161.163 140.843,161.544 140.843,182.753 87.884,182.753 87.757,182.753
no net on Bottom Layer "NONET_L02_P1068" (solid, remove dead copper, pour order 1068): 126.746,164.846 130.175,161.417 130.175,165.1
no net on Bottom Layer "NONET_L02_P1066" (solid, remove dead copper, pour order 1066): 123.571,156.21 121.793,157.988 119.201,157.988 119.074,158.115 121.868,161.215 122.047,161.707 122.359,161.707 123.571,160.495
no net on Bottom Layer "NONET_L02_P1064" (solid, remove dead copper, pour order 1064): 117.177,165.989 123.571,165.989 122.047,167.513 120.65,167.513 120.65,167.64 118.999,169.291
no net on Bottom Layer "NONET_L02_P1062" (solid, remove dead copper, pour order 1062): 106.172,174.879 107.722,173.329 107.722,170.434 107.758,170.434 112.26,174.625
no net on Bottom Layer "NONET_L02_P1060" (solid, remove dead copper, pour order 1060): 147.193,156.083 160.274,156.083 160.274,159.258 163.83,162.814 169.926,162.814 171.196,164.084 171.015,164.265 171.015,169.016 183.038,169.016 190.406,161.647 190.406,161.163 200.152,161.163 200.533,161.544 200.533,182.753 147.574,182.753 147.447,182.753
no net on Bottom Layer "NONET_L02_P1058" (solid, remove dead copper, pour order 1058): 186.436,164.846 189.865,161.417 189.865,165.1
no net on Bottom Layer "NONET_L02_P1056" (solid, remove dead copper, pour order 1056): 183.261,156.21 181.483,157.988 178.891,157.988 178.764,158.115 181.558,161.215 181.737,161.707 182.049,161.707 183.261,160.495
no net on Bottom Layer "NONET_L02_P1054" (solid, remove dead copper, pour order 1054): 176.867,165.989 183.261,165.989 181.737,167.513 180.34,167.513 180.34,167.64 178.689,169.291
no net on Bottom Layer "NONET_L02_P1052" (solid, remove dead copper, pour order 1052): 165.862,174.879 167.412,173.329 167.412,170.434 167.448,170.434 171.95,174.625
no net on Bottom Layer "NONET_L02_P1050" (solid, remove dead copper, pour order 1050): 47.244,136.398 48.794,134.848 48.794,131.953 48.83,131.953 53.332,136.144
no net on Bottom Layer "NONET_L02_P1048" (solid, remove dead copper, pour order 1048): 58.249,127.508 64.643,127.508 63.119,129.032 61.722,129.032 61.722,129.159 60.071,130.81
no net on Bottom Layer "NONET_L02_P1046" (solid, remove dead copper, pour order 1046): 64.643,117.729 62.865,119.507 60.273,119.507 60.146,119.634 62.94,122.734 63.119,123.226 63.431,123.226 64.643,122.014
no net on Bottom Layer "NONET_L02_P1044" (solid, remove dead copper, pour order 1044): 67.818,126.365 71.247,122.936 71.247,126.619
no net on Bottom Layer "NONET_L02_P1042" (solid, remove dead copper, pour order 1042): 28.575,117.602 41.656,117.602 41.656,120.777 45.212,124.333 51.308,124.333 52.578,125.603 52.397,125.784 52.397,130.535 64.42,130.535 71.788,123.166 71.788,122.682 81.534,122.682 81.915,123.063 81.915,144.272 28.956,144.272 28.829,144.272
no net on Bottom Layer "NONET_L02_P1040" (solid, remove dead copper, pour order 1040): 87.503,117.602 100.584,117.602 100.584,120.777 104.14,124.333 110.236,124.333 111.506,125.603 111.325,125.784 111.325,130.535 123.348,130.535 130.716,123.166 130.716,122.682 140.462,122.682 140.843,123.063 140.843,144.272 87.884,144.272 87.757,144.272
no net on Bottom Layer "NONET_L02_P1038" (solid, remove dead copper, pour order 1038): 126.746,126.365 130.175,122.936 130.175,126.619
no net on Bottom Layer "NONET_L02_P1036" (solid, remove dead copper, pour order 1036): 123.571,117.729 121.793,119.507 119.201,119.507 119.074,119.634 121.868,122.734 122.047,123.226 122.359,123.226 123.571,122.014
no net on Bottom Layer "NONET_L02_P1034" (solid, remove dead copper, pour order 1034): 117.177,127.508 123.571,127.508 122.047,129.032 120.65,129.032 120.65,129.159 118.999,130.81
no net on Bottom Layer "NONET_L02_P1032" (solid, remove dead copper, pour order 1032): 106.172,136.398 107.722,134.848 107.722,131.953 107.758,131.953 112.26,136.144
no net on Bottom Layer "NONET_L02_P1030" (solid, remove dead copper, pour order 1030): 147.193,117.602 160.274,117.602 160.274,120.777 163.83,124.333 169.926,124.333 171.196,125.603 171.015,125.784 171.015,130.535 183.038,130.535 190.406,123.166 190.406,122.682 200.152,122.682 200.533,123.063 200.533,144.272 147.574,144.272 147.447,144.272
no net on Bottom Layer "NONET_L02_P1028" (solid, remove dead copper, pour order 1028): 186.436,126.365 189.865,122.936 189.865,126.619
no net on Bottom Layer "NONET_L02_P1026" (solid, remove dead copper, pour order 1026): 183.261,117.729 181.483,119.507 178.891,119.507 178.764,119.634 181.558,122.734 181.737,123.226 182.049,123.226 183.261,122.014
no net on Bottom Layer "NONET_L02_P1024" (solid, remove dead copper, pour order 1024): 176.867,127.508 183.261,127.508 181.737,129.032 180.34,129.032 180.34,129.159 178.689,130.81
no net on Bottom Layer "NONET_L02_P1022" (solid, remove dead copper, pour order 1022): 165.862,136.398 167.412,134.848 167.412,131.953 167.448,131.953 171.95,136.144
no net on Bottom Layer "NONET_L02_P1020" (solid, remove dead copper, pour order 1020): 47.371,96.52 48.921,94.97 48.921,92.075 48.957,92.075 53.459,96.266
no net on Bottom Layer "NONET_L02_P1018" (solid, remove dead copper, pour order 1018): 58.376,87.63 64.77,87.63 63.246,89.154 61.849,89.154 61.849,89.281 60.198,90.932
no net on Bottom Layer "NONET_L02_P1016" (solid, remove dead copper, pour order 1016): 64.77,77.851 62.992,79.629 60.4,79.629 60.273,79.756 63.067,82.856 63.246,83.348 63.558,83.348 64.77,82.136
no net on Bottom Layer "NONET_L02_P1014" (solid, remove dead copper, pour order 1014): 67.945,86.487 71.374,83.058 71.374,86.741
no net on Bottom Layer "NONET_L02_P1012" (solid, remove dead copper, pour order 1012): 28.702,77.724 41.783,77.724 41.783,80.899 45.339,84.455 51.435,84.455 52.705,85.725 52.524,85.906 52.524,90.657 64.547,90.657 71.915,83.288 71.915,82.804 81.661,82.804 82.042,83.185 82.042,104.394 29.083,104.394 28.956,104.394
no net on Bottom Layer "NONET_L02_P1010" (solid, remove dead copper, pour order 1010): 87.63,77.724 100.711,77.724 100.711,80.899 104.267,84.455 110.363,84.455 111.633,85.725 111.452,85.906 111.452,90.657 123.475,90.657 130.843,83.288 130.843,82.804 140.589,82.804 140.97,83.185 140.97,104.394 88.011,104.394 87.884,104.394
no net on Bottom Layer "NONET_L02_P1008" (solid, remove dead copper, pour order 1008): 126.873,86.487 130.302,83.058 130.302,86.741
no net on Bottom Layer "NONET_L02_P1006" (solid, remove dead copper, pour order 1006): 123.698,77.851 121.92,79.629 119.328,79.629 119.201,79.756 121.995,82.856 122.174,83.348 122.486,83.348 123.698,82.136
no net on Bottom Layer "NONET_L02_P1004" (solid, remove dead copper, pour order 1004): 117.304,87.63 123.698,87.63 122.174,89.154 120.777,89.154 120.777,89.281 119.126,90.932
no net on Bottom Layer "NONET_L02_P1002" (solid, remove dead copper, pour order 1002): 106.299,96.52 107.849,94.97 107.849,92.075 107.885,92.075 112.387,96.266
no net on Bottom Layer "NONET_L02_P1000" (solid, remove dead copper, pour order 1000): 147.32,77.724 160.401,77.724 160.401,80.899 163.957,84.455 170.053,84.455 171.323,85.725 171.142,85.906 171.142,90.657 183.165,90.657 190.533,83.288 190.533,82.804 200.279,82.804 200.66,83.185 200.66,104.394 147.701,104.394 147.574,104.394
no net on Bottom Layer "NONET_L02_P998" (solid, remove dead copper, pour order 998): 186.563,86.487 189.992,83.058 189.992,86.741
no net on Bottom Layer "NONET_L02_P996" (solid, remove dead copper, pour order 996): 183.388,77.851 181.61,79.629 179.018,79.629 178.891,79.756 181.685,82.856 181.864,83.348 182.176,83.348 183.388,82.136
no net on Bottom Layer "NONET_L02_P994" (solid, remove dead copper, pour order 994): 176.994,87.63 183.388,87.63 181.864,89.154 180.467,89.154 180.467,89.281 178.816,90.932
no net on Bottom Layer "NONET_L02_P992" (solid, remove dead copper, pour order 992): 165.989,96.52 167.539,94.97 167.539,92.075 167.575,92.075 172.077,96.266
no net on Bottom Layer "NONET_L02_P990" (solid, remove dead copper, pour order 990): 165.862,57.785 167.412,56.235 167.412,53.34 167.448,53.34 171.95,57.531
no net on Bottom Layer "NONET_L02_P988" (solid, remove dead copper, pour order 988): 176.867,48.895 183.261,48.895 181.737,50.419 180.34,50.419 180.34,50.546 178.689,52.197
no net on Bottom Layer "NONET_L02_P986" (solid, remove dead copper, pour order 986): 183.261,39.116 181.483,40.894 178.891,40.894 178.764,41.021 181.558,44.121 181.737,44.613 182.049,44.613 183.261,43.401
no net on Bottom Layer "NONET_L02_P984" (solid, remove dead copper, pour order 984): 186.436,47.752 189.865,44.323 189.865,48.006
no net on Bottom Layer "NONET_L02_P982" (solid, remove dead copper, pour order 982): 147.193,38.989 160.274,38.989 160.274,42.164 163.83,45.72 169.926,45.72 171.196,46.99 171.015,47.171 171.015,51.922 183.038,51.922 190.406,44.553 190.406,44.069 200.152,44.069 200.533,44.45 200.533,65.659 147.574,65.659 147.447,65.659
no net on Bottom Layer "NONET_L02_P980" (solid, remove dead copper, pour order 980): 106.172,57.785 107.722,56.235 107.722,53.34 107.758,53.34 112.26,57.531
no net on Bottom Layer "NONET_L02_P978" (solid, remove dead copper, pour order 978): 117.177,48.895 123.571,48.895 122.047,50.419 120.65,50.419 120.65,50.546 118.999,52.197
no net on Bottom Layer "NONET_L02_P976" (solid, remove dead copper, pour order 976): 123.571,39.116 121.793,40.894 119.201,40.894 119.074,41.021 121.868,44.121 122.047,44.613 122.359,44.613 123.571,43.401
no net on Bottom Layer "NONET_L02_P974" (solid, remove dead copper, pour order 974): 126.746,47.752 130.175,44.323 130.175,48.006
no net on Bottom Layer "NONET_L02_P972" (solid, remove dead copper, pour order 972): 87.503,38.989 100.584,38.989 100.584,42.164 104.14,45.72 110.236,45.72 111.506,46.99 111.325,47.171 111.325,51.922 123.348,51.922 130.716,44.553 130.716,44.069 140.462,44.069 140.843,44.45 140.843,65.659 87.884,65.659 87.757,65.659
GND on Bottom Layer "GND_L02_P970" (solid, remove dead copper, pour order 970): 28.575,38.989 41.656,38.989 41.656,42.164 45.212,45.72 51.308,45.72 52.578,46.99 52.397,47.171 52.397,51.922 64.42,51.922 71.788,44.553 71.788,44.069 81.534,44.069 81.915,44.45 81.915,65.659 28.956,65.659 28.829,65.659
NetC1_2 on Bottom Layer "NETC1_2_L02_P968" (solid, remove dead copper, pour order 968): 67.818,47.752 71.247,44.323 71.247,48.006
no net on Bottom Layer "Bottom Layer-No Net" (solid, pour order 966): 71.374,44.831
VCC on Bottom Layer "VCC_L02_P964" (solid, remove dead copper, pour order 964): 64.643,39.116 62.865,40.894 60.273,40.894 60.146,41.021 62.94,44.121 63.119,44.613 63.431,44.613 64.643,43.401
no net on Bottom Layer "Bottom Layer-No Net 1" (solid, pour order 962): 61.595,42.545
NetC1_2 on Bottom Layer "NETC1_2_L02_P960" (solid, remove dead copper, pour order 960): 58.249,48.895 64.643,48.895 63.119,50.419 61.722,50.419 61.722,50.546 60.071,52.197
NetC2_1 on Bottom Layer "NETC2_1_L02_P954" (solid, remove dead copper, pour order 954): 47.244,57.785 48.794,56.235 48.794,53.34 48.83,53.34 53.332,57.531

## Other copper
Bottom Layer:
  text "Astable mode" at 62.611,233.172 h1.52
  text "Astable mode" at 121.539,233.172 h1.52
  text "Astable mode" at 181.229,233.172 h1.52
  text "V 0.1" at 60.544,230.124 h1.52
  text "V 0.1" at 119.472,230.124 h1.52
  text "V 0.1" at 179.162,230.124 h1.52
  text "Astable mode" at 62.611,193.929 h1.52
  text "Astable mode" at 121.539,193.929 h1.52
  text "Astable mode" at 181.229,193.929 h1.52
  text "V 0.1" at 60.544,190.881 h1.52
  text "V 0.1" at 119.472,190.881 h1.52
  text "V 0.1" at 179.162,190.881 h1.52
  text "Astable mode" at 62.611,153.416 h1.52
  text "Astable mode" at 121.539,153.416 h1.52
  text "Astable mode" at 181.229,153.416 h1.52
  text "V 0.1" at 60.544,150.368 h1.52
  text "V 0.1" at 119.472,150.368 h1.52
  text "V 0.1" at 179.162,150.368 h1.52
  text "Astable mode" at 62.611,114.935 h1.52
  text "Astable mode" at 121.539,114.935 h1.52
  text "Astable mode" at 181.229,114.935 h1.52
  text "V 0.1" at 60.544,111.887 h1.52
  text "V 0.1" at 119.472,111.887 h1.52
  text "V 0.1" at 179.162,111.887 h1.52
  text "Astable mode" at 62.738,75.057 h1.52
  text "Astable mode" at 121.666,75.057 h1.52
  text "Astable mode" at 181.356,75.057 h1.52
  text "V 0.1" at 60.671,72.009 h1.52
  text "V 0.1" at 119.599,72.009 h1.52
  text "V 0.1" at 179.289,72.009 h1.52
  text "Astable mode" at 62.611,36.322 h1.52
  text "Astable mode" at 121.539,36.322 h1.52
  text "Astable mode" at 181.229,36.322 h1.52
  text "V 0.1" at 60.544,33.274 h1.52
  text "V 0.1" at 119.472,33.274 h1.52
  text "V 0.1" at 179.162,33.274 h1.52